# EAGLE board pic32_old (EAGLE 9.3.0)
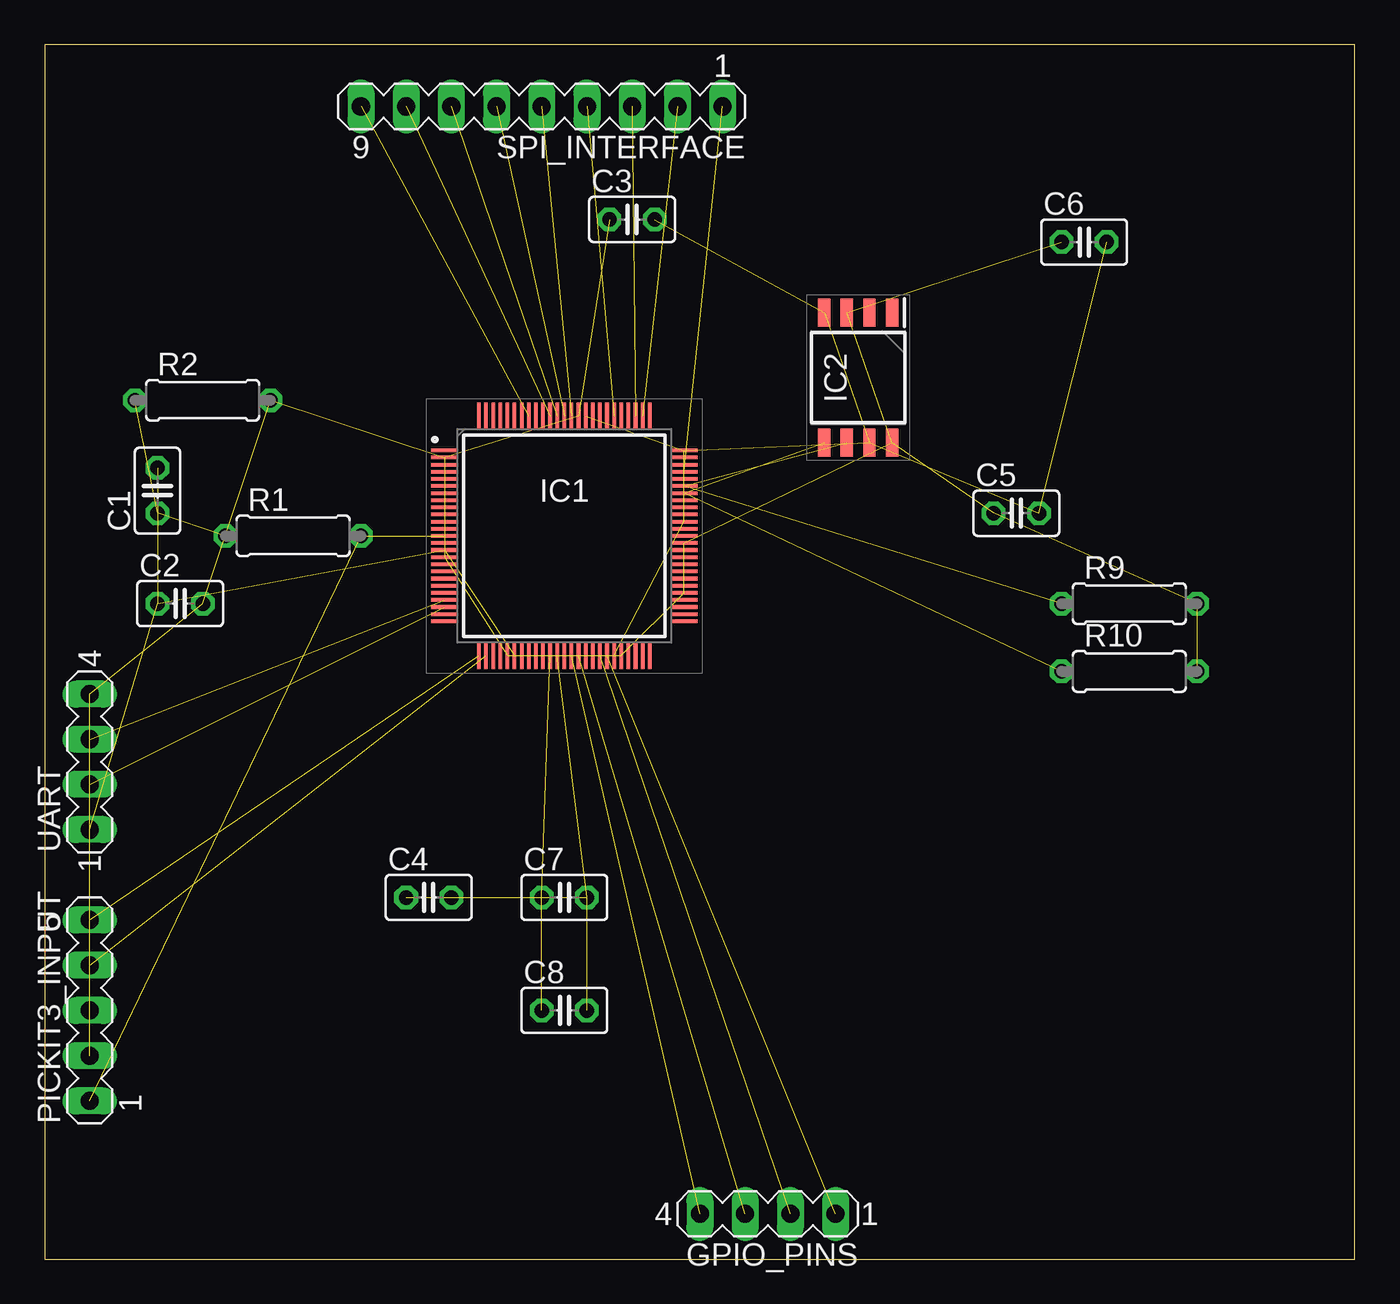
[diagram p0: board, top side]
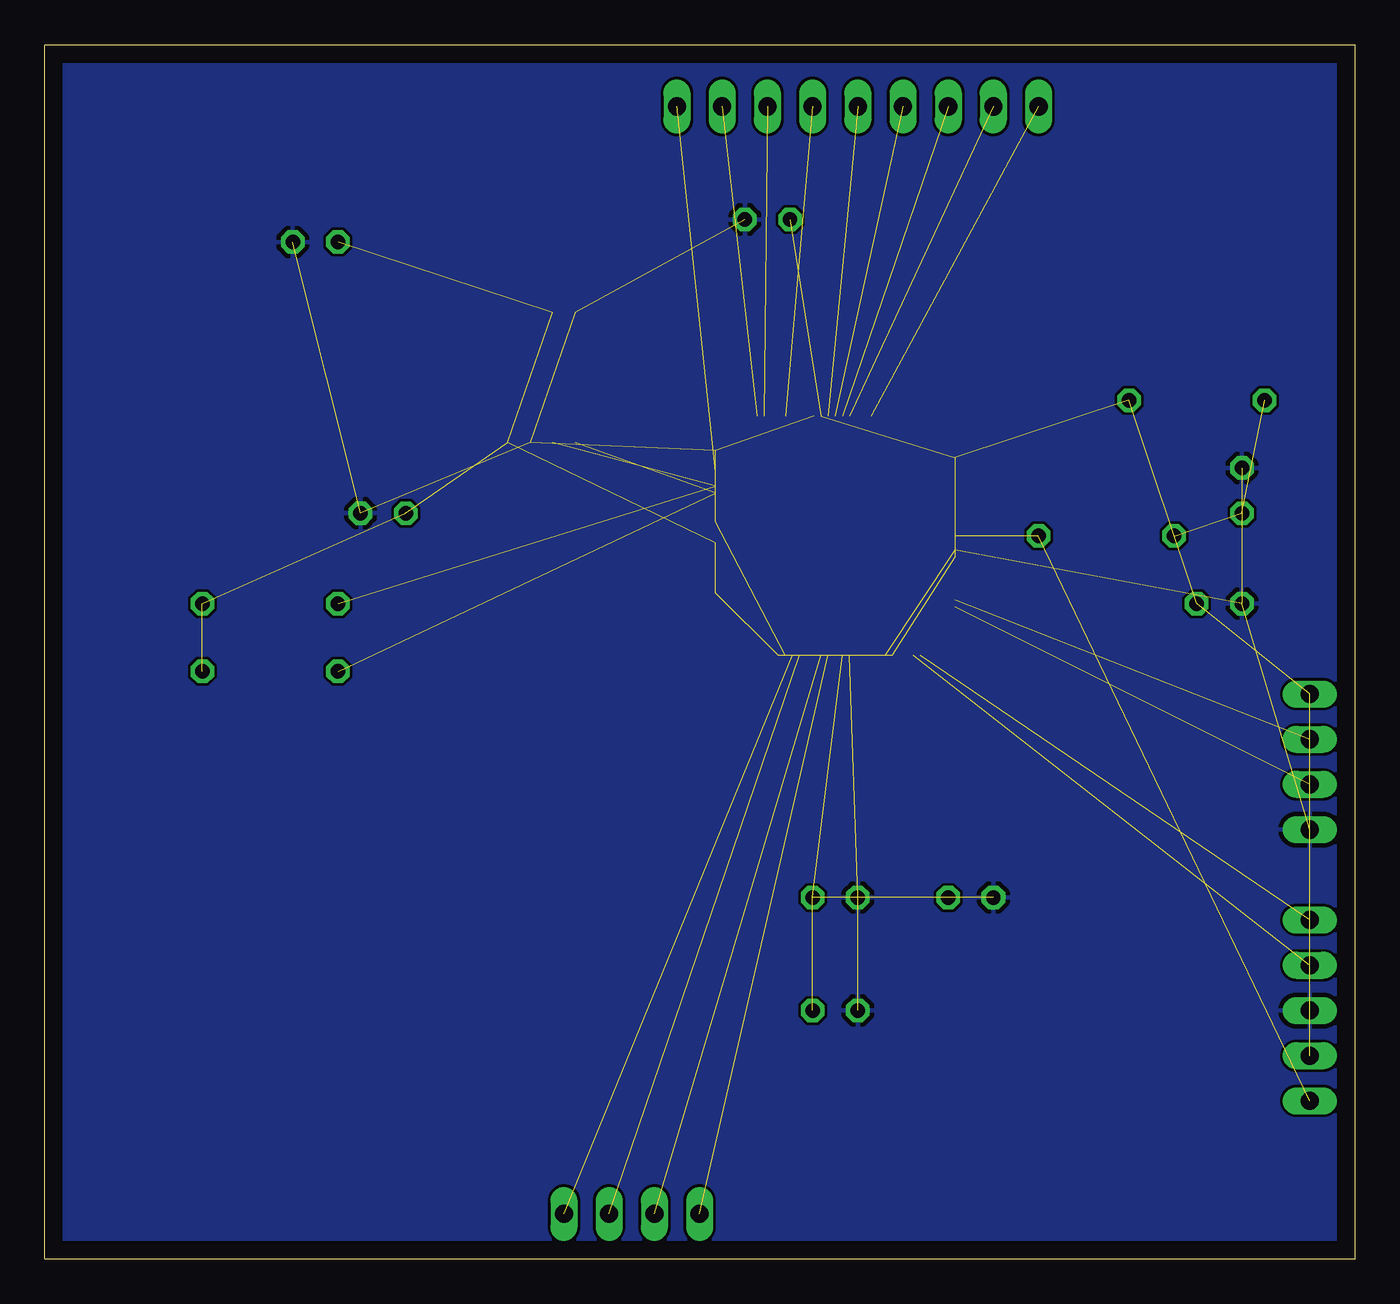
[diagram p1: board, bottom side, seen from below]

Size 73.64 x 68.25 mm. Coordinates in mm from the lower left corner, seen from the top.
Outline: 0,0 73.64,0 73.64,68.25 0,68.25 0,0
Copper layers (1*16): Top 0.035mm / dielectric 1.5mm / Bottom 0.035mm
Design rules "default": minimum track width 6mil, minimum drill 0.35mm, track to track 6mil, track to pad 6mil, pad to pad 6mil, via to via 6mil, smd to smd 6mil, copper to edge 40mil, drill to drill 6mil, minimum pad ring 10mil, minimum via ring 8mil, stop-mask expansion 4mil, vias tented up to drill 0mil, thermal gap 10mil

## Footprints (pad centres in the part's own frame; a part is rotated, then mirrored left to right if it is on the bottom)
C025-025X050 = drill 0.813 octagon: 1 -1.27,0; 2 1.27,0
MA04-1 = drill 1.016 long: 1 -3.81,0; 2 -1.27,0; 3 1.27,0; 4 3.81,0
QFP40P1400X1400X120-100N = smd 1.475 x 0.2: 1 -6.738,4.8; 2 -6.738,4.4; 3 -6.738,4; 4 -6.738,3.6; 5 -6.738,3.2; 6 -6.738,2.8; 7 -6.738,2.4; 8 -6.738,2; 9 -6.738,1.6; 10 -6.738,1.2; 11 -6.738,0.8; 12 -6.738,0.4; 13 -6.738,0; 14 -6.738,-0.4; 15 -6.738,-0.8; 16 -6.738,-1.2; 17 -6.738,-1.6; 18 -6.738,-2; 19 -6.738,-2.4; 20 -6.738,-2.8; 21 -6.738,-3.2; 22 -6.738,-3.6; 23 -6.738,-4; 24 -6.738,-4.4; 25 -6.738,-4.8; 51 6.738,-4.8; 52 6.738,-4.4; 53 6.738,-4; 54 6.738,-3.6; 55 6.738,-3.2; 56 6.738,-2.8; 57 6.738,-2.4; 58 6.738,-2; 59 6.738,-1.6; 60 6.738,-1.2; 61 6.738,-0.8; 62 6.738,-0.4; 63 6.738,0; 64 6.738,0.4; 65 6.738,0.8; 66 6.738,1.2; 67 6.738,1.6; 68 6.738,2; 69 6.738,2.4; 70 6.738,2.8; 71 6.738,3.2; 72 6.738,3.6; 73 6.738,4; 74 6.738,4.4; 75 6.738,4.8 | smd 0.2 x 1.475: 26 -4.8,-6.738; 27 -4.4,-6.738; 28 -4,-6.738; 29 -3.6,-6.738; 30 -3.2,-6.738; 31 -2.8,-6.738; 32 -2.4,-6.738; 33 -2,-6.738; 34 -1.6,-6.738; 35 -1.2,-6.738; 36 -0.8,-6.738; 37 -0.4,-6.738; 38 0,-6.738; 39 0.4,-6.738; 40 0.8,-6.738; 41 1.2,-6.738; 42 1.6,-6.738; 43 2,-6.738; 44 2.4,-6.738; 45 2.8,-6.738; 46 3.2,-6.738; 47 3.6,-6.738; 48 4,-6.738; 49 4.4,-6.738; 50 4.8,-6.738; 76 4.8,6.738; 77 4.4,6.738; 78 4,6.738; 79 3.6,6.738; 80 3.2,6.738; 81 2.8,6.738; 82 2.4,6.738; 83 2,6.738; 84 1.6,6.738; 85 1.2,6.738; 86 0.8,6.738; 87 0.4,6.738; 88 0,6.738; 89 -0.4,6.738; 90 -0.8,6.738; 91 -1.2,6.738; 92 -1.6,6.738; 93 -2,6.738; 94 -2.4,6.738; 95 -2.8,6.738; 96 -3.2,6.738; 97 -3.6,6.738; 98 -4,6.738; 99 -4.4,6.738; 100 -4.8,6.738
SOIC127P794X203-8N = smd 1.55 x 0.7: 1 -3.65,1.905; 2 -3.65,0.635; 3 -3.65,-0.635; 4 -3.65,-1.905; 5 3.65,-1.905; 6 3.65,-0.635; 7 3.65,0.635; 8 3.65,1.905
MA05-1 = drill 1.016 long: 1 -5.08,0; 2 -2.54,0; 3 0,0; 4 2.54,0; 5 5.08,0
0207/7 = drill 0.813 octagon: 1 -3.81,0; 2 3.81,0
MA09-1 = drill 1.016 long: 1 -10.16,0; 2 -7.62,0; 3 -5.08,0; 4 -2.54,0; 5 0,0; 6 2.54,0; 7 5.08,0; 8 7.62,0; 9 10.16,0

## Placement (x,y rotation side)
C1  0.1 uF  [C025-025X050]  6.35,43.18 90 top
C2  0.1 uF  [C025-025X050]  7.62,36.83 0 top
C3  0.1 uF  [C025-025X050]  33.02,58.42 0 top
C4  0.1 uF  [C025-025X050]  21.59,20.32 0 top
C5  0.1 uF  [C025-025X050]  54.61,41.91 0 top
C6  0.1 uF  [C025-025X050]  58.42,57.15 0 top
C7  0.1 uF  [C025-025X050]  29.21,20.32 0 top
C8  0.1 uF  [C025-025X050]  29.21,13.97 0 top
GPIO_PINS  J4  [MA04-1]  40.64,2.54 180 top
IC1  PIC32MK1024GPE100-I_PT  [QFP40P1400X1400X120-100N]  29.21,40.64 0 top
IC2  24LC1025-I_SM  [SOIC127P794X203-8N]  45.72,49.53 270 top
PICKIT3_INPUT  J3  [MA05-1]  2.54,13.97 90 top
R1  1K  [0207/7]  13.97,40.64 0 top
R2  10K  [0207/7]  8.89,48.26 0 top
R9  3.3K  [0207/7]  60.96,36.83 0 top
R10  3.3K  [0207/7]  60.96,33.02 0 top
SPI_INTERFACE  J1  [MA09-1]  27.94,64.77 180 top
UART  J2  [MA04-1]  2.54,27.94 90 top

## Library data of the parts
C1-C8 = rcl; SPICEPREFIX: C
GPIO_PINS PICKIT3_INPUT SPI_INTERFACE UART = con-lstb; OC_FARNELL: unknown; OC_NEWARK: unknown
IC1 = SamacSys_Parts; DESCRIPTION: 32-bit Microcontrollers - MCU MCU32, 120MHz, 4 I2C, 6 I2S, USB FS, CAN 2.0B, 12-bit ADC; HEIGHT: 1.2mm; MANUFACTURER_NAME: Microchip; MANUFACTURER_PART_NUMBER: PIC32MK1024GPE100-I/PT; MOUSER_PART_NUMBER: 579-2MK1024GPE100IPT; MOUSER_PRICE-STOCK: https://www.mouser.com/Search/Refine.aspx?Keyword=579-2MK1024GPE100IPT
IC2 = 24LC1025-I_SM; DESCRIPTION: 1M 128Kx8 2.5V Ser. EEPROM,24LC1025-I/SM; HEIGHT: 2.03mm; MANUFACTURER_NAME: Microchip; MANUFACTURER_PART_NUMBER: 24LC1025-I/SM; MOUSER_PART_NUMBER: 579-24LC1025-I/SM; MOUSER_PRICE-STOCK: https://www.mouser.com/Search/Refine.aspx?Keyword=579-24LC1025-I%2FSM
R1 R2 R9 R10 = rcl; SPICEPREFIX: R

## Nets
GND: C1.2 C2.1 C3.2 C4.1 C5.2 C6.2 C7.1 C8.1 IC1.15 IC1.31 IC1.36 IC1.45 IC1.65 IC1.75 IC1.85 IC2.4 IC2.7 PICKIT3_INPUT.3 UART.1
N$1: C1.1 R1.1 R2.1
N$GPIO1: GPIO_PINS.4 IC1.39
N$GPIO2: GPIO_PINS.3 IC1.40
N$GPIO3: GPIO_PINS.2 IC1.43
N$GPIO4: GPIO_PINS.1 IC1.44
N$MCLR: IC1.13 PICKIT3_INPUT.1 R1.2
N$MISO: IC1.78 SPI_INTERFACE.3
N$MOSI: IC1.77 SPI_INTERFACE.2
N$PGC1: IC1.26 PICKIT3_INPUT.5
N$PGD1: IC1.27 PICKIT3_INPUT.4
N$SCK: IC1.72 SPI_INTERFACE.1
N$SCL: IC1.70 IC2.6 R9.1
N$SDA: IC1.69 IC2.5 R10.1
N$SS1: IC1.81 SPI_INTERFACE.4
N$SS2: IC1.87 SPI_INTERFACE.5
N$SS3: IC1.88 SPI_INTERFACE.6
N$SS4: IC1.89 SPI_INTERFACE.7
N$SS5: IC1.90 SPI_INTERFACE.8
N$SS6: IC1.93 SPI_INTERFACE.9
N$U1RX: IC1.22 UART.3
N$U1TX: IC1.23 UART.2
VDD: C2.2 C3.1 C4.2 C5.1 C6.1 C7.2 C8.2 IC1.2 IC1.16 IC1.30 IC1.37 IC1.46 IC1.55 IC1.62 IC1.86 IC2.3 IC2.8 PICKIT3_INPUT.2 R2.2 R9.2 R10.2 UART.4

## Tracks (layer width: path | path; a pad name or v marks a point on that pad's centre or on a via)
GND  (18 unrouted)
  pour Bottom: -7.62,72.39 78.74,72.39 78.74,-5.08 -7.62,-5.08
N$1  (2 unrouted)
N$GPIO1  (1 unrouted)
N$GPIO2  (1 unrouted)
N$GPIO3  (1 unrouted)
N$GPIO4  (1 unrouted)
N$MCLR  (2 unrouted)
N$MISO  (1 unrouted)
N$MOSI  (1 unrouted)
N$PGC1  (1 unrouted)
N$PGD1  (1 unrouted)
N$SCK  (1 unrouted)
N$SCL  (2 unrouted)
N$SDA  (2 unrouted)
N$SS1  (1 unrouted)
N$SS2  (1 unrouted)
N$SS3  (1 unrouted)
N$SS4  (1 unrouted)
N$SS5  (1 unrouted)
N$SS6  (1 unrouted)
N$U1RX  (1 unrouted)
N$U1TX  (1 unrouted)
VDD  (21 unrouted)